# EAGLE board dataloggerver4.0 (EAGLE 9.6.2)
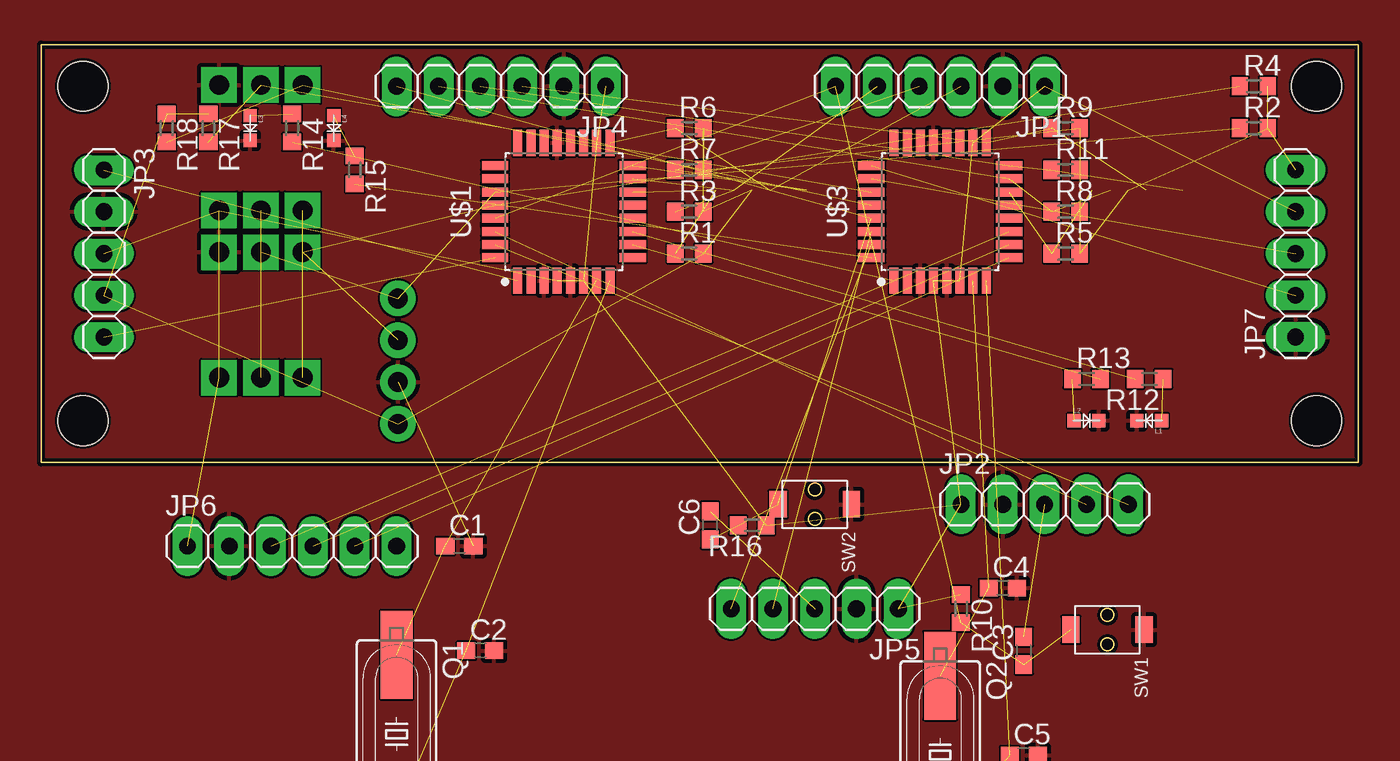
[diagram p0: board, top side]
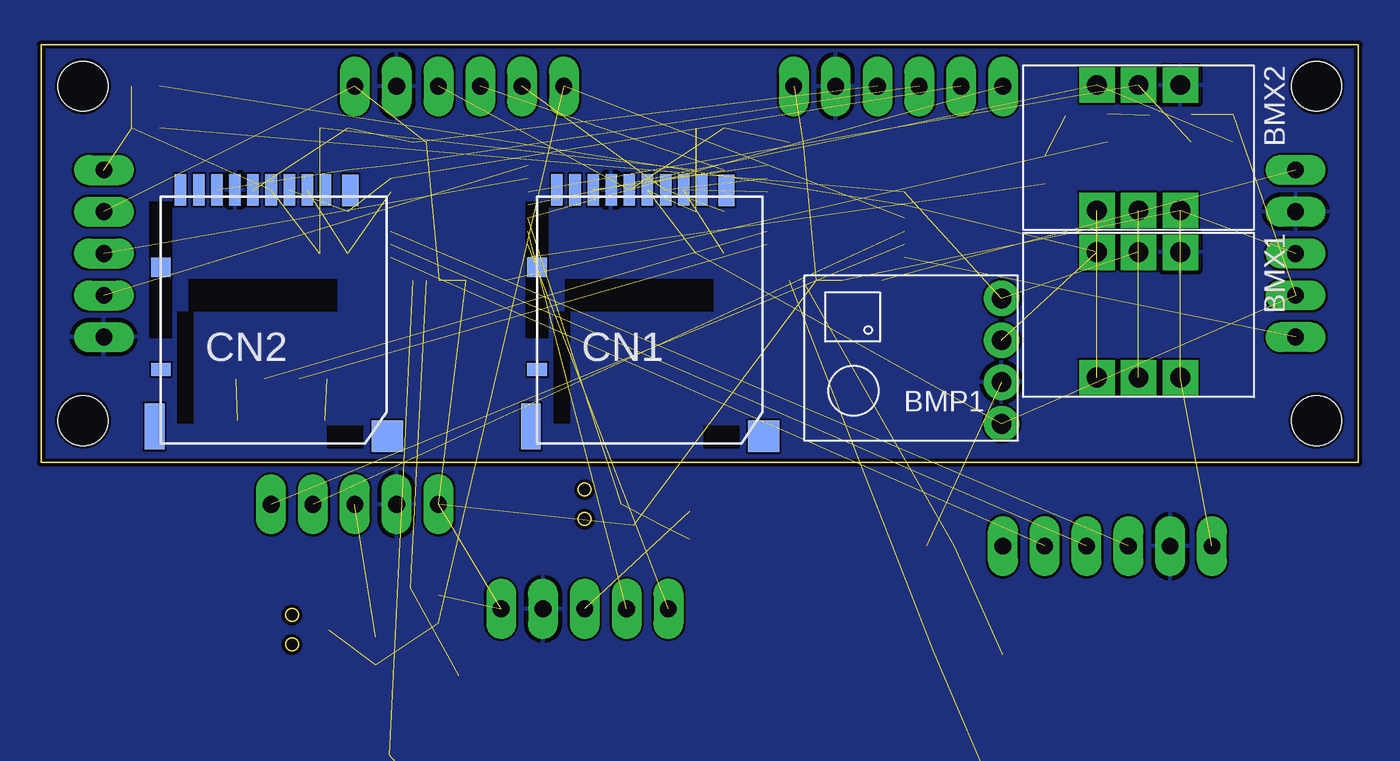
[diagram p1: board, bottom side, seen from below]

Size 80.01 x 25.4 mm. Coordinates in mm from the lower left corner, seen from the top.
Outline: 0,0 0,25.4 80.01,25.4 80.01,0 0,0
Copper layers (1*16): Top 0.035mm / dielectric 1.6mm / Bottom 0.035mm
Design rules "jlcpcb-2layers": minimum track width 5mil, minimum drill 0.3mm, track to track 5mil, track to pad 5mil, pad to pad 5mil, via to via 5mil, smd to smd 5mil, copper to edge 0.2mm, drill to drill 6mil, minimum pad ring 10mil, minimum via ring 3mil, stop-mask expansion 4mil, vias tented up to drill 0mil, thermal gap 10mil
Holes 3 mm at 2.54,22.86 2.54,2.54 77.47,22.86 77.47,2.54

## Footprints (pad centres in the part's own frame; a part is rotated, then mirrored left to right if it is on the bottom)
GY-68 = drill 1.2: P1 -5,4; P2 -5,1.46; P3 -5,-1.08; P4 -5,-3.62
BMX055 = drill 1.2 pad 1.5 square: 3V3 8.81,-9.53; GND 1.19,-4.46; SCL 1.19,-9.53; SDA 1.19,-7; VCC 8.81,-4.46; VCCIO 8.81,-7
C1608 = smd 1.1 x 1: 1 -0.85,0; 2 0.85,0
DM3AT = smd 0.7 x 1.9: CD/DAT3 2.2,6.4; CLK -1.1,6.4; CMD 1.1,6.4; DAT0 -3.3,6.4; DAT1 -4.4,6.4; DAT2 3.3,6.4; DET_B -5.5,6.4; VDD 0,6.4; VSS -2.2,6.4 | smd 1.2 x 0.8: DET_A -6.7,-4.5 | smd 1 x 1.9: P$9 4.8,6.381 | smd 1.2 x 1.2: P$11 -6.7,1.7 | smd 1.2 x 2.8: P$13 -7.081,-7.973 | smd 1.9 x 1.9: P$14 7.054,-8.562
1X06 = drill 1.016 long: 1 -6.35,0; 2 -3.81,0; 3 -1.27,0; 4 1.27,0; 5 3.81,0; 6 6.35,0
1X05 = drill 1.016 long: 1 -5.08,0; 2 -2.54,0; 3 0,0; 4 2.54,0; 5 5.08,0
OSXX1608C1A = smd 0.8 x 0.8: AN -0.75,0; CT 0.75,0
HC49UP = smd 5.334 x 1.93: 1 -4.826,0; 2 4.826,0
R0603 = smd 1 x 1.1: 1 -0.85,0; 2 0.85,0
TVAF06-A020B-R = smd 1.6 x 1.05: P$1 0,2.225; P$2 0,-2.225
QFP80P900X900X120-32N = smd 1.6 x 0.547: ADC6 4.181,-1.2; ADC7 4.181,1.2; AREF 4.181,-0.4; AVCC 4.181,-2; GND -4.181,1.2; GND2 -4.181,-0.4; GND3 4.181,0.4; PB5 4.181,-2.8; PB6 -4.181,-2; PB7 -4.181,-2.8; PC0 4.181,2; PC1 4.181,2.8; PD3 -4.181,2.8; PD4 -4.181,2; VCC -4.181,0.4; VCC2 -4.181,-1.2 | smd 0.547 x 1.6: PB0 -0.4,-4.181; PB1 0.4,-4.181; PB2SS 1.2,-4.181; PB3MOSI 2,-4.181; PB4MISO 2.8,-4.181; PC2 2.8,4.181; PC3 2,4.181; PC4SDA 1.2,4.181; PC5SCL 0.4,4.181; PC6RESET -0.4,4.181; PD0RX -1.2,4.181; PD1TX -2,4.181; PD2 -2.8,4.181; PD5 -2.8,-4.181; PD6 -2,-4.181; PD7 -1.2,-4.181

## Placement (x,y rotation side)
BMP1  BMP180  [GY-68]  26.67,6.35 180 bottom
BMX1  BMX055  [BMX055]  6.35,13.97 270 bottom
BMX2  BMX055  [BMX055]  6.35,24.13 270 bottom
C1  22p  [C1608]  25.4,-5.08 0 top  (outside the outline)
C2  22p  [C1608]  26.67,-11.43 0 top  (outside the outline)
C3  0.1μ  [C1608]  59.69,-11.43 90 top  (outside the outline)
C4  22p  [C1608]  58.42,-7.62 0 top  (outside the outline)
C5  22p  [C1608]  59.69,-17.78 0 top  (outside the outline)
C6  0.1μ  [C1608]  40.64,-3.81 90 top
CN1  DM3AT  [DM3AT]  43.18,10.16 0 bottom
CN2  DM3AT  [DM3AT]  66.04,10.16 0 bottom
JP1  [1X06]  54.61,22.86 180 top
JP2  [1X05]  60.96,-2.54 0 top
JP3  [1X05]  3.81,12.7 270 top
JP4  [1X06]  27.94,22.86 180 top
JP5  [1X05]  46.99,-8.89 180 top  (outside the outline)
JP6  [1X06]  15.24,-5.08 0 top  (outside the outline)
JP7  [1X05]  76.2,12.7 90 top
L1  [OSXX1608C1A]  67.31,2.54 180 top
L2  [OSXX1608C1A]  63.5,2.54 0 top
L3  [OSXX1608C1A]  12.7,20.32 270 top
L4  [OSXX1608C1A]  17.78,20.32 270 top
Q1  16mhz  [HC49UP]  21.59,-16.51 270 top  (outside the outline)
Q2  16mhz  [HC49UP]  54.61,-17.78 270 top  (outside the outline)
R1  10k  [R0603]  39.37,12.7 0 top
R2  10k  [R0603]  73.66,20.32 0 top
R3  10k  [R0603]  39.37,15.24 0 top
R4  10k  [R0603]  73.66,22.86 0 top
R5  10k  [R0603]  62.23,12.7 0 top
R6  10k  [R0603]  39.37,20.32 0 top
R7  10k  [R0603]  39.37,17.78 0 top
R8  10k  [R0603]  62.23,15.24 0 top
R9  10k  [R0603]  62.23,20.32 0 top
R10  10k  [R0603]  55.88,-8.89 270 top  (outside the outline)
R11  10k  [R0603]  62.23,17.78 0 top
R12  100  [R0603]  67.31,5.08 180 top
R13  100  [R0603]  63.5,5.08 0 top
R14  100  [R0603]  15.24,20.32 270 top
R15  100  [R0603]  19.05,17.78 270 top
R16  10k  [R0603]  43.18,-3.81 180 top  (outside the outline)
R17  10k  [R0603]  10.16,20.32 270 top
R18  10k  [R0603]  7.62,20.32 270 top
SW1  [TVAF06-A020B-R]  64.77,-10.16 270 top  (outside the outline)
SW2  [TVAF06-A020B-R]  46.99,-2.54 270 top
U$1  ATMEGA328P-AU  [QFP80P900X900X120-32N]  31.75,15.24 90 top
U$3  ATMEGA328P-AU  [QFP80P900X900X120-32N]  54.61,15.24 90 top

## Library data of the parts
BMP1 = BMP180
BMX1 BMX2 = BMX055
C1-C6 = rcl; SPICEPREFIX: C
CN1 CN2 = microSD
JP1-JP7 = pinhead
L1-L4 = Chip LED
Q1 Q2 = crystal; OC_FARNELL: unknown; OC_NEWARK: unknown
R1-R18 = rcl; SPICEPREFIX: R
SW1 SW2 = Tact switch
U$1 U$3 = ATMAGA328P-AU

## Nets
3V3: BMX1.3V3 BMX2.3V3
+3V3: BMP1.P1 CN1.VDD CN2.VDD JP3.4 JP7.5 R1.2 R2.2 R3.2 R4.2 R5.2 R6.2 R7.2 R8.2 R9.2 R11.2 R17.1 R18.1
+5V: BMX1.VCC BMX2.VCC JP1.1 JP2.1 JP3.3 JP4.1 JP5.1 JP6.1 JP7.4 R10.1 R16.1 U$1.AVCC U$1.VCC U$1.VCC2 U$3.AVCC U$3.VCC U$3.VCC2
BORD1: JP3.1 U$1.PD3
BORD2: JP3.5 U$1.PD2
BORDRX: JP7.3 U$3.PC3
BORDTX: JP7.2 U$3.PC2
GND: BMP1.P2 BMX1.GND BMX2.GND C1.2 C2.2 C4.2 C5.2 CN1.VSS CN2.VSS JP1.2 JP2.2 JP3.2 JP4.2 JP5.2 JP6.2 JP7.1 L1.CT L2.CT L3.CT L4.CT SW1.P$1 SW2.P$1 U$1.GND U$1.GND2 U$1.GND3 U$3.GND U$3.GND2 U$3.GND3
GPSRX: JP6.4 U$3.PD6
GPSTX: JP6.3 U$3.PD7
LED1.0: R15.2 U$3.PD2
LED1.1: R14.2 U$3.PD3
LED1.2: R13.2 U$1.PD6
LED1.3: R12.2 U$1.PD7
MISO: CN1.DAT0 JP1.4 R7.1 U$1.PB4MISO
MISO1: CN2.DAT0 JP4.4 R11.1 U$3.PB4MISO
MOSI: CN1.CMD JP1.5 R3.1 U$1.PB3MOSI
MOSI1: CN2.CMD JP4.5 R8.1 U$3.PB3MOSI
N$1: L2.AN R13.1
N$2: L4.AN R15.1
N$3: C4.1 Q2.1 U$3.PB6
N$5: JP6.6
N$7: L1.AN R12.1
N$11: L3.AN R14.1
N$12: C1.1 Q1.1 U$1.PB6
N$13: C2.1 Q1.2 U$1.PB7
N$14: C5.1 Q2.2 U$3.PB7
RESET: C3.2 JP2.3
RESET1: C6.2 JP5.3
RESETB: C3.1 JP1.6 R10.2 SW1.P$2 U$1.PC6RESET
RESETB1: C6.1 JP4.6 R16.2 SW2.P$2 U$3.PC6RESET
RST: JP6.5 U$3.PD5
RX: JP2.4 U$1.PD0RX
RX1: JP5.4 U$3.PD0RX
SCK: CN1.CLK JP1.3 R6.1 U$1.PB5
SCK1: CN2.CLK JP4.3 R9.1 U$3.PB5
SCL: BMP1.P3 BMX1.SCL R4.1 U$1.PC5SCL
SCL1: BMX2.SCL R18.2 U$3.PC5SCL
SDA: BMP1.P4 BMX1.SDA R2.1 U$1.PC4SDA
SDA1: BMX2.SDA R17.2 U$3.PC4SDA
SS: CN1.CD/DAT3 R1.1 U$1.PB2SS
SS1: CN2.CD/DAT3 R5.1 U$3.PB2SS
TX: JP2.5 U$1.PD1TX
TX1: JP5.5 U$3.PD1TX
VCCIO: BMX1.VCCIO BMX2.VCCIO

## Tracks (layer width: path | path; a pad name or v marks a point on that pad's centre or on a via)
3V3  (1 unrouted)
+3V3  (16 unrouted)
+5V  (16 unrouted)
BORD1  (1 unrouted)
BORD2  (1 unrouted)
BORDRX  (1 unrouted)
BORDTX  (1 unrouted)
GND  (1 unrouted)
  pour Top: -52.07,-44.45 -85.09,-11.43 -85.09,55.88 -54.61,86.36 76.2,86.36 105.41,57.15 105.41,-12.7 73.66,-44.45 -50.8,-44.45
  pour Bottom: -52.07,-44.45 -85.09,-11.43 -85.09,55.88 -54.61,86.36 76.2,86.36 105.41,57.15 105.41,-10.16 105.41,-12.7 78.74,-39.37 73.66,-44.45 -50.8,-44.45
  pour Top: 1.27,-26.67 -17.78,-7.62 -17.78,30.48 -7.62,40.64 76.2,40.64 91.44,25.4 91.44,-5.08 69.85,-26.67
  pour Bottom: 1.27,-26.67 -17.78,-7.62 -17.78,25.4 -17.78,30.48 -8.89,39.37 -7.62,40.64 67.31,40.64 76.2,40.64 86.36,30.48 91.44,25.4 91.44,-2.54 91.44,-5.08 72.39,-24.13 69.85,-26.67
GPSRX  (1 unrouted)
GPSTX  (1 unrouted)
LED1.0  (1 unrouted)
LED1.1  (1 unrouted)
LED1.2  (1 unrouted)
LED1.3  (1 unrouted)
MISO  (3 unrouted)
MISO1  (3 unrouted)
MOSI  (3 unrouted)
MOSI1  (3 unrouted)
N$1  (1 unrouted)
N$2  (1 unrouted)
N$3  (2 unrouted)
N$7  (1 unrouted)
N$11  (1 unrouted)
N$12  (2 unrouted)
N$13  (2 unrouted)
N$14  (2 unrouted)
RESET  (1 unrouted)
RESET1  (1 unrouted)
RESETB  (4 unrouted)
RESETB1  (4 unrouted)
RST  (1 unrouted)
RX  (1 unrouted)
RX1  (1 unrouted)
SCK  (3 unrouted)
SCK1  (3 unrouted)
SCL  (3 unrouted)
SCL1  (2 unrouted)
SDA  (3 unrouted)
SDA1  (2 unrouted)
SS  (2 unrouted)
SS1  (2 unrouted)
TX  (1 unrouted)
TX1  (1 unrouted)
VCCIO  (1 unrouted)